# Altium PCB v4.3.PcbDoc
Units mm, origin at the board's own origin, x right, y up, seen from the top; angles counter-clockwise.
Board outline 100.32 x 66.7 mm, 2 copper layers (Top Layer, Bottom Layer); 32 components, 24 nets, 124 pads, 72 vias.
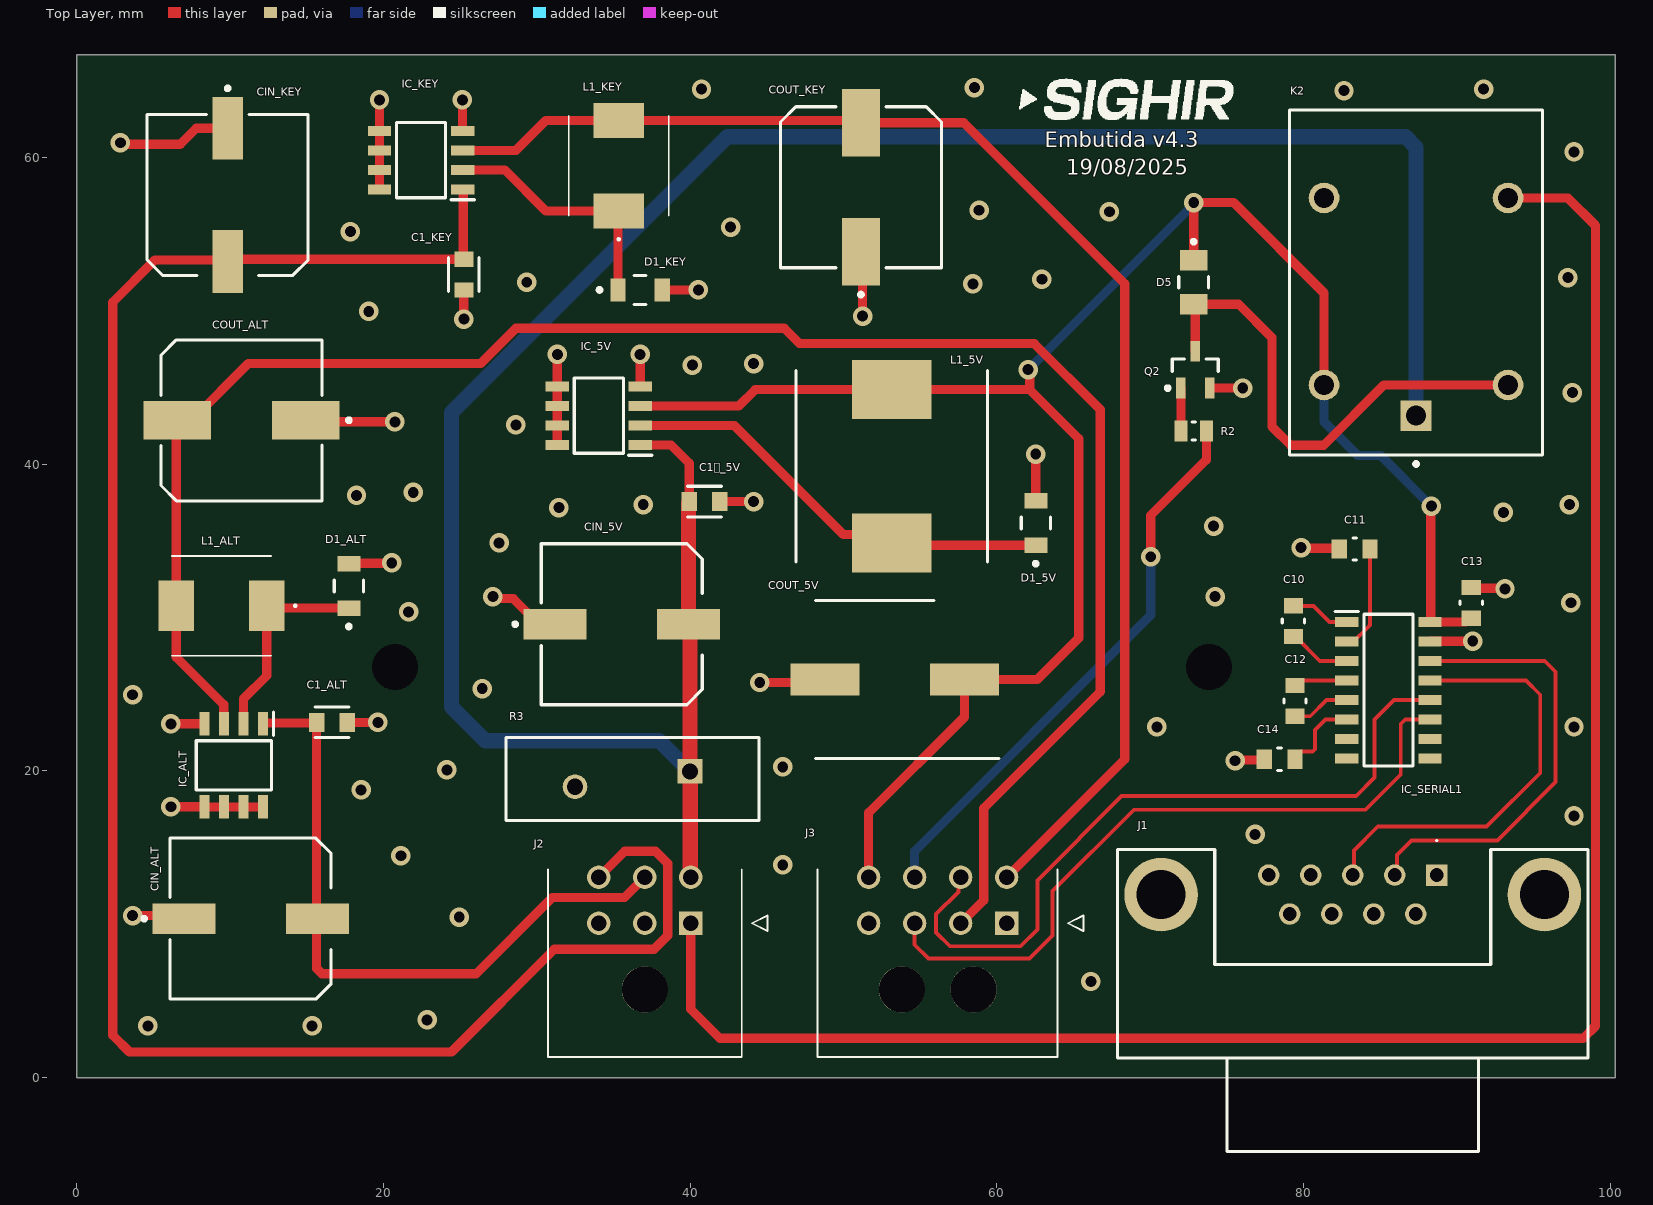
[diagram p0: Top Layer view]
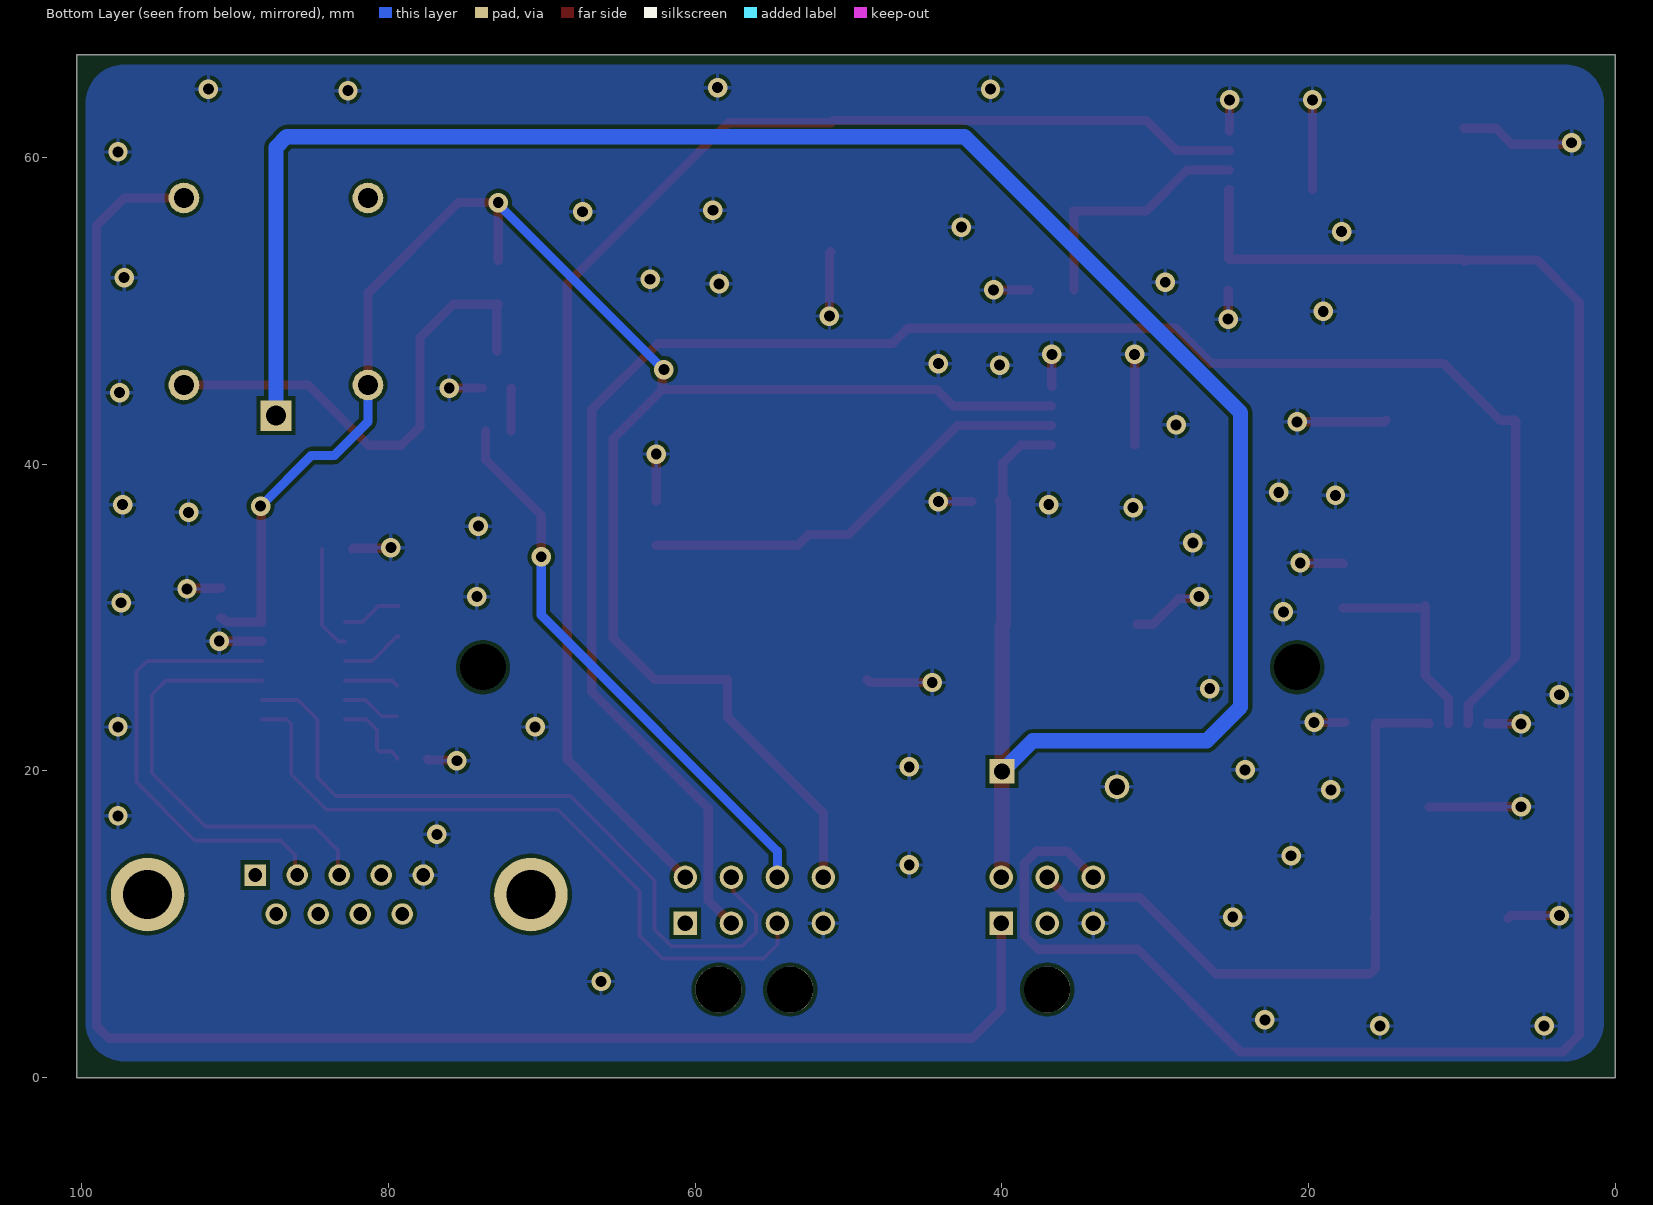
[diagram p1: Bottom Layer view, seen from below]
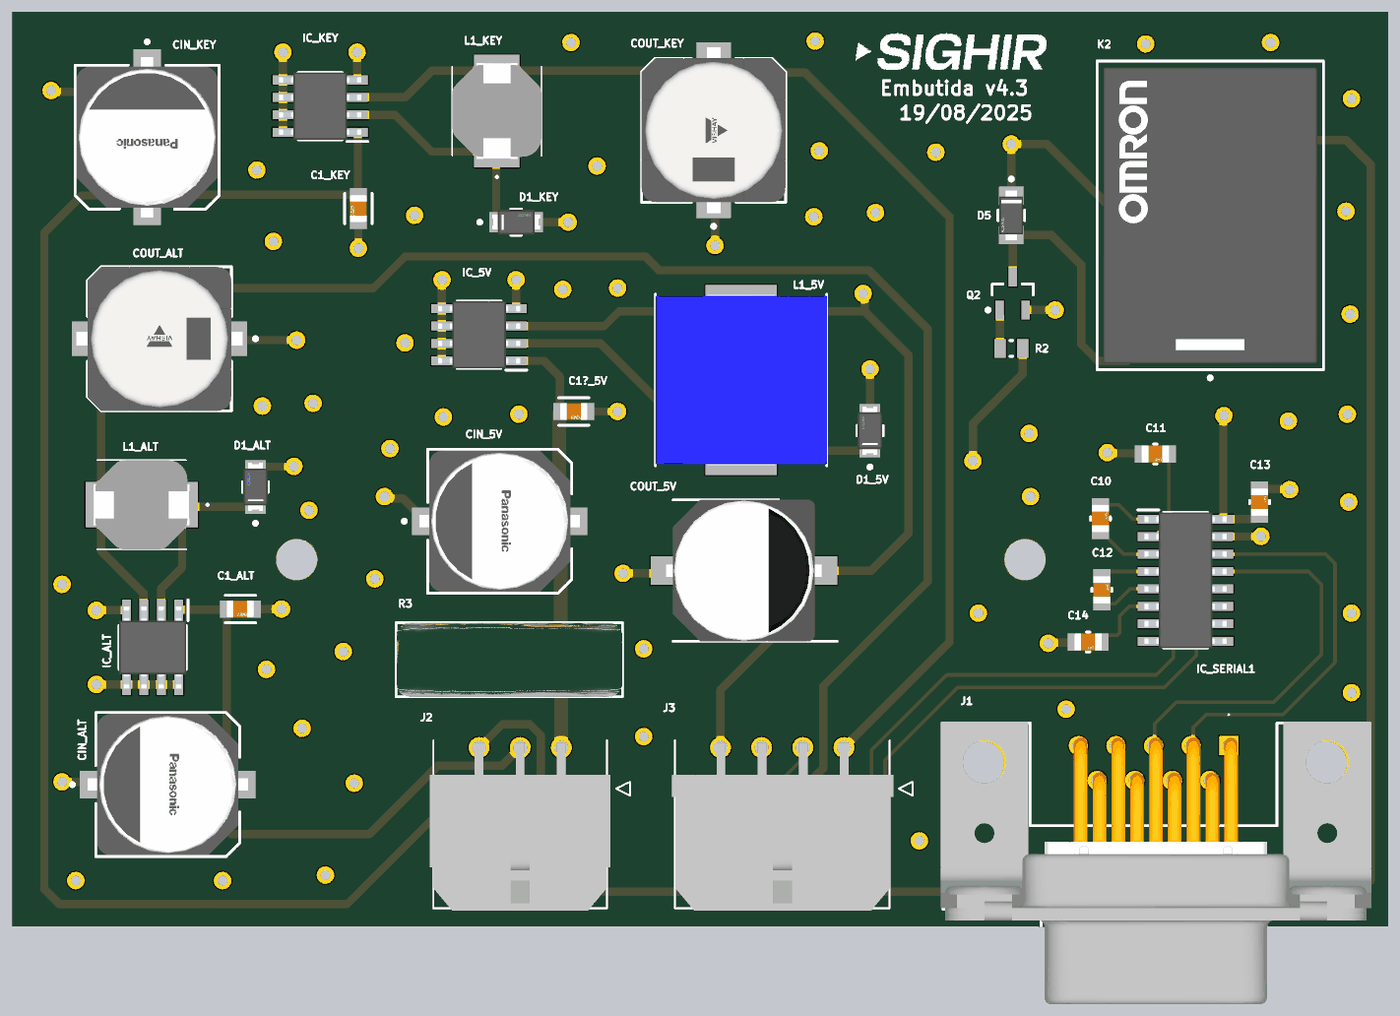
[diagram p2: 3D render of the assembled board from above, using the file's embedded part models]

## Layer stack, top to bottom
Top Solder: solder mask 0.0102, Solder Resist, Dk 3.5
Top Layer: signal copper 0.0356
Dielectric 1: dielectric 0.32, FR-4, Dk 4.8
Bottom Layer: signal copper 0.0356
Bottom Solder: solder mask 0.0102, Solder Resist, Dk 3.5

## Board outline
0,0 0,66.7 100.32,66.7 100.32,0

## Design rules (kind name [scope] priority, off if disabled: settings)
Clearance [All] p1: gap=0.254 ignorepadtopadclearanceinfootprint=FALSE
HoleSize [All] p1: absolutevalues=TRUE maxlimit=3.5 minlimit=0.025 maxpercent=80.000 minpercent=20.000
PolygonConnect [All] p1: connectstyle=Relief reliefconductorwidth=0.254 reliefentries=4 polygonreliefangle="90 Angle" airgapwidth=0.254
RoutingVias [All] p1: holewidth=0.711 width=1.27 viastyle="Through Hole" minholewidth=0.711 minwidth=1.27 maxholewidth=0.711 maxwidth=1.27
SolderMaskExpansion [All] p1: expansion=0.102 istentingtop=FALSE
SupplyNets "Schematic Supply Nets_8" [InNet('3V3_KEY')] p1: voltage=0.000
SupplyNets "Schematic Supply Nets_7" [InNet('ALT_IN')] p2: voltage=0.000
SupplyNets "Schematic Supply Nets_4" [InNet('KEY_IN')] p3: voltage=0.000
SupplyNets "Schematic Supply Nets_3" [InNet('3V3_ALT')] p4: voltage=0.000
SupplyNets "Schematic Supply Nets_2" [InNet('GND')] p5: voltage=0.000
SupplyNets "Schematic Supply Nets_1" [InNet('5V')] p6: voltage=0.000
SupplyNets "Schematic Supply Nets" [InNet('24V')] p7: voltage=0.000
Width [All] p1: maxlimit=1 minlimit=0.254 preferedwidth=0.254 minimp=50.000000 maximp=50.000000 favimp=50.000000
29 further rules are at their usual default settings.

## Classes and differential pairs
component class Power: "C1_5V" C1_ALT C1_KEY CIN_5V CIN_ALT CIN_KEY COUT_5V COUT_ALT COUT_KEY D1_5V D1_ALT D1_KEY IC_5V IC_ALT IC_KEY L1_5V L1_ALT L1_KEY
component class Comm: C10 C11 C12 C13 C14 D5 IC_SERIAL1 J1 J2 J3 K2 Q2 R2 R3

## Components (designator, comment, footprint, x,y, rotation, side; value= is the part's Value field where it differs from the comment)
"C1_5V" "08055C105KAT2A" FP-0805-L_2_01_0_2-W_1_25-MFG 40.937,37.568 r0 top
C1_ALT "08055C105KAT2A" FP-0805-L_2_01_0_2-W_1_25-MFG 16.637,23.168 r0 top
C1_KEY "08055C105KAT2A" FP-0805-L_2_01_0_2-W_1_25-MFG 25.237,52.368 r270 top
C10 "08055C104J4T2A" FP-0805-L_2_01_0_2-W_1_25-MFG 79.337,29.768 r90 top
C11 "08055C104J4T2A" FP-0805-L_2_01_0_2-W_1_25-MFG 83.337,34.468 r0 top
C12 "08055C104J4T2A" FP-0805-L_2_01_0_2-W_1_25-MFG 79.437,24.568 r90 top
C13 "08055C104J4T2A" FP-0805-L_2_01_0_2-W_1_25-MFG 90.937,30.968 r90 top
C14 "08055C104J4T2A" FP-0805-L_2_01_0_2-W_1_25-MFG 78.437,20.768 r0 top
CIN_5V "EEEFK1V471SP" FP-FKSG-MFG 35.537,29.568 r0 top
CIN_ALT "EEEFK1V471SP" FP-FKSG-MFG 11.337,10.368 r0 top
CIN_KEY "EEEFK1V471SP" FP-FKSG-MFG 9.837,57.568 r270 top
COUT_5V "B40900B7277M000" CAPAE1030X1050N 53.337,25.968 r180 top
COUT_ALT "MAL215099001E3" FP-MAL2150-1010-MFG 10.737,42.868 r180 top
COUT_KEY "MAL215099001E3" FP-MAL2150-1010-MFG 51.137,58.068 r90 top
D1_5V "1N5819HW1-7-F" FP-SOD123F_Type_B-MFG 62.537,36.168 r90 top value=30pF
D1_ALT "1N5819HW1-7-F" FP-SOD123F_Type_B-MFG 17.737,32.068 r90 top value=30pF
D1_KEY "1N5819HW1-7-F" FP-SOD123F_Type_B-MFG 36.737,51.368 r0 top value=30pF
D5 "S1GFL" FP-425AD-MFG 72.837,51.868 r270 top
IC_5V "XL1509-5.0E1" SOIC127P600X175-8N 34.037,43.168 r180 top
IC_ALT "XL1509-3V3E1" SOIC127P600X175-8N 10.237,20.368 r270 top
IC_KEY "XL1509-3V3E1" SOIC127P600X175-8N 22.449,59.833 r180 top
IC_SERIAL1 "MAX3232CSE+T" SOIC127P600X175-16N 85.537,25.268 r0 top
J1 "DB9" L77DFE09S1AMN 88.687,13.208 r0 top
J2 "43045-0600" 43045-06(00,01,02,10) 40.037,10.068 r0 top
J3 "43045-0800" 43045-08(00,01,02,10) 60.637,10.068 r0 top
K2 "G5LE-14-DC5" FP-G5LE-14-DC5-MFG 87.337,51.868 r90 top
L1_5V "SRR1260-680M" INDPM125125X650N 53.137,39.868 r90 top
L1_ALT "SPM6545VT-470M-D" SPM6545VT 9.437,30.768 r180 top
L1_KEY "SPM6545VT-470M-D" SPM6545VT 35.337,59.468 r90 top
Q2 "BC847B" INF-SOT23_M 72.937,46.168 r90 top
R2 "10k" RESC2013X50X30LL20T20 72.837,42.168 r0 top
R3 "MOV-14D471K" FP-MOV-14D471K-MFG 36.237,19.468 r180 top value=516pF

## Footprints (in the part's own frame and the unit in brackets; to place one, negate y for a bottom-side part, rotate by r counter-clockwise, add the part's x,y. Pads: shape width x height; smd on the part's side, far side on the other; paste and mask are expansions set on the pad)
43045-06(00,01,02,10) [mm]
  rect 1.52x1.52 hole 1.02: 1(0,0)
  round 1.52 hole 1.02: 2(-3,0) 3(-6,0) 4(0,3) 5(-3,3) 6(-6,3)
  round 3 hole 3 unplated: 7(-3,-4.32)
  silkscreen extent -9.33,-8.72 5,3.52, body extent -9.58,-8.89 3.57,3.34, height 8.69
43045-08(00,01,02,10) [mm]
  rect 1.52x1.52 hole 1.02: 1(0,0)
  round 1.52 hole 1.02: 2(-3,0) 3(-6,0) 4(-9,0) 5(0,3) 6(-3,3) 7(-6,3) 8(-9,3)
  round 3 hole 3 unplated: 9(-2.16,-4.32) 10(-6.84,-4.32)
  silkscreen extent -12.32,-8.72 5,3.52, body extent -12.54,-8.89 3.61,3.34, height 8.73
CAPAE1030X1050N [mm]
  rect 4.5x2.1 smd: 1(-4.55,0) 2(4.55,0)
  silkscreen extent -6.8,-5.15 5.15,5.15, body extent -5.67,-5.18 5.67,5.18, height 12.67
FP-425AD-MFG [mm]
  rect 1.34x1.8 smd paste+0 mask+0: 1(-1.43,0) 2(1.43,0)
  silkscreen extent -2.77,-0.97 0.39,0.97, body extent -2.2,-1.07 2.2,1.07, height 0.25
FP-0805-L_2_01_0_2-W_1_25-MFG [mm]
  rect 1x1.25 smd paste+0 mask+0: 1(-1,0) 2(1,0)
  silkscreen extent -1.1,-1 1.1,1, body extent -1.6,-0.82 1.6,0.82, height 0.25
FP-FKSG-MFG [mm]
  rect 4.1x2 smd paste+0 mask+0: 1(-4.35,0) 2(4.35,0)
  silkscreen extent -7.07,-5.25 5.25,5.25, body extent -6.65,-5.5 6.65,5.5, height 0.25
FP-G5LE-14-DC5-MFG [mm]
  rect 2x2 hole 1.3 paste-2539.97 mask+0: 1(-8.7,0)
  round 2 hole 1.3 paste-2539.97 mask+0: 2(-6.7,-6) 3(5.5,-6) 4(5.5,6) 5(-6.7,6)
  silkscreen extent -11.97,-8.25 11.25,8.25, body extent -11.35,-8.35 11.35,8.35, height 0.25
FP-MAL2150-1010-MFG [mm]
  rect 4.4x2.5 smd paste+0 mask+0: 1(-4.2,0) 2(4.2,0)
  silkscreen extent -7.13,-5.25 5.25,5.25, body extent -6.65,-5.5 6.65,5.5, height 0.25
FP-MOV-14D471K-MFG [mm]
  rect 1.6x1.6 hole 1.05 paste-2539.97 mask+0: 1(-3.75,-0.5)
  round 1.6 hole 1.05 paste-2539.97 mask+0: 2(3.75,0.5)
  silkscreen extent -8.25,-2.7 8.25,2.7, body extent -8.35,-2.8 8.35,2.8, height 0.25
FP-SOD123F_Type_B-MFG [mm]
  rect 1x1.5 smd paste+0 mask+0: 1(-1.45,0) 2(1.45,0)
  silkscreen extent -2.77,-0.95 0.38,0.95, body extent -2.05,-1.05 2.05,1.05, height 0.25
INDPM125125X650N [mm]
  rect 3.85x5.2 smd: 1(-5,0) 2(5,0)
  silkscreen extent -6.25,-6.25 6.25,6.25, body extent -6.25,-6.25 6.25,6.25, height 6.5
INF-SOT23_M [mm] "SOT23, 3-Leads, Body 2.9x1.3 mm, Pitch 0.95 mm, IPC Low Density"
  rect 1.35x0.6 smd: 1(-1.2,0.95) 2(-1.2,-0.95) 3(1.2,0)
  silkscreen extent -1.32,-1.5 0.7,1.92, body extent -0.7,-1.5 0.7,1.5, height 1.1
L77DFE09S1AMN [mm]
  rect 1.4x1.4 hole 0.9: 1(0,0)
  round 1.4 hole 0.9: 2(-2.74,0) 3(-5.48,0) 4(-8.22,0) 5(-10.96,0) 6(-1.37,-2.54) 7(-4.11,-2.54) 8(-6.85,-2.54) 9(-9.59,-2.54)
  round 4.8 hole 3.2: MH1(7.02,-1.27) MH2(-17.98,-1.27)
  silkscreen extent -20.83,-18.04 9.87,2.3, body extent -21.01,-18.85 10.39,1.75, height 13.89
RESC2013X50X30LL20T20 [mm] "Chip Resistor, 2-Leads, Body 2.00x1.25mm, IPC High Density"
  rect 0.85x1.35 smd: 1(-0.825,0) 2(0.825,0)
  silkscreen extent -0.1,-0.58 0.1,0.58, body extent -1.1,-0.72 1.1,0.72, height 0.5
SOIC127P600X175-8N [mm]
  rect 1.525x0.65 smd: 1(-2.712,1.905) 2(-2.712,0.635) 3(-2.712,-0.635) 4(-2.712,-1.905) 5(2.712,-1.905) 6(2.712,-0.635) 7(2.712,0.635) 8(2.712,1.905)
  silkscreen extent -3.47,-2.45 1.6,2.58, body extent -3,-2.45 3,2.45, height 1.75
SOIC127P600X175-16N [mm]
  rect 1.525x0.65 smd: 1(-2.712,4.445) 2(-2.712,3.175) 3(-2.712,1.905) 4(-2.712,0.635) 5(-2.712,-0.635) 6(-2.712,-1.905) 7(-2.712,-3.175) 8(-2.712,-4.445) 9(2.712,-4.445) 10(2.712,-3.175) 11(2.712,-1.905) 12(2.712,-0.635) 13(2.712,0.635) 14(2.712,1.905) 15(2.712,3.175) 16(2.712,4.445)
  silkscreen extent -3.47,-4.95 1.6,5.12, body extent -3,-4.95 3,4.95, height 1.75
SPM6545VT [mm]
  rect 2.3x3.3 smd: 1(-2.95,0) 2(2.95,0)
  silkscreen extent -4.85,-3.25 3.25,3.25, body extent -3.48,-3.25 3.52,3.25, height 4.35

## Part data
"C1_5V" C1_ALT C1_KEY: library part CMP-2007-04696-2, "General Purpose Ceramic Capacitor, 0805, 1uF, 10%, X7R, 15%, 50V", Capacitance=1uF, Case Code (Imperial)=0805, Case Code (Metric)=2012, Dielectric=X7R, Max Operating Temperature=125°C, Min Operating Temperature=-55°C, Package Quantity=1, Tolerance=10%, Voltage=50V, Case/Package=0805, Contact Plating=Tin, Depth=1.25mm, Dissipation Factor=2.5%, Lead Free="Lead Free", Length=2.01mm, Mount="Surface Mount", Packaging="Tape and Reel", Radiation Hardening=No, REACH SVHC="No SVHC", RoHS Compliant=Yes, Series=-, Termination=SMD/SMT, Thickness=0.037inch, Voltage Rating=50V, Voltage Rating (DC)=50V, Width=0.049inch
C10 C11 C12 C13 C14: library part CMP-2007-04725-2, "Automotive Ceramic Capacitor, 0805, 100nF, 5%, X7R, 15%, 50V", Capacitance=100nF, Case Code (Imperial)=0805, Case Code (Metric)=2012, Dielectric=X7R, Max Operating Temperature=125°C, Min Operating Temperature=-55°C, Package Quantity=4000, Ratings=AEC-Q200, Tolerance=5%, Voltage Rating=50V, Case/Package=0805, Construction=Flat, Contact Plating=Tin, Depth=1.25mm, Dissipation Factor=2.5%, Height=0.94mm, Lead Free="Lead Free", Length=2.01mm, Mount="Surface Mount", Number of Pins=2, Packaging="Tape and Reel", Radiation Hardening=No, RoHS Compliant=Yes, Series=-, Termination=SMD/SMT, Thickness=0.037inch, Voltage Rating (DC)=50V, Width=0.049inch
CIN_5V CIN_ALT CIN_KEY: library part CMP-05427-000037-1, "CAP ALUM 470UF 20% 35V SMD", Capacitance=470uF, Case/Package=Radial, ESR (Equivalent Series Resistance)=80mR, Max Operating Temperature=105°C, Min Operating Temperature=-55°C, Package Quantity=500, Ripple Current=552.5mA, Ripple Current (AC)=850mA, Tolerance=20%, Voltage Rating=35V, Diameter=10mm, Height=10.2mm, Height - Seated (Max)=0.413inch, Life (Hours)=2000Hour, Mount="Surface Mount", Packaging="Cut Tape", Polarity=Polar, RoHS Compliant=Yes, Voltage Rating (DC)=35V
COUT_5V: "Capacitor Polarised", Manufacturer_Name=TDK, Mouser Part Number=871-B40900B7277M000, Datasheet Link=https://product.tdk.com/system/files/dam/doc/product/capacitor/aluminum-electrolytic/hybrid-polymer/data_sheet/20/30/db/aec/b40900.pdf, Height=10.5mm, Manufacturer_Part_Number=B40900B7277M000, Mouser Price/Stock=https://www.mouser.co.uk/ProductDetail/EPCOS-TDK/B40900B7277M000?qs=P1JMDcb91o5CBLRrUxE0Gw%3D%3D
COUT_ALT COUT_KEY: library part CMP-00030-44434444-1, "MAL215099001E3 Aluminum Electrolytic Capacitor, 220 uF, 35 V, ± 20%, 2000 hours @ 105°C, Radial Can - SMD", Capacitance=220µF, Case/Package=Radial, Max Operating Temperature=105°C, Min Operating Temperature=-55°C, Ripple Current=630mA, Tolerance=20%, Voltage Rating=35V, Diameter=10mm, Height=10mm, Height - Seated (Max)=10.4902mm, Impedance=150mΩ, Life (Hours)=2500hours, Mount="Surface Mount", NexarPartId=44434444, Packaging=Digi-Reel®, Polarity=Polar, Radiation Hardening=No, REACH SVHC=Unknown, Ripple Current (AC)=630mA, RoHS=Compliant, Schedule B="8532220020, 8532220020", Voltage Rating (DC)=35V
D1_5V D1_ALT D1_KEY: library part CMP-12791-000028-1, "DIODE SBR 40V 1A SOD123F", Capacitance=30pF, Forward Current=1A, Manufacturer="Diodes Inc.", Max Junction Temp=+125°C, Max Repetitive Reverse Voltage=40V, Max Surge Forward Current=30A, Package="SOD123F (Type B)", Peak Reverse Current=0.5mA, Temperature="-55°C to +125°C", Temperature Range Low=-55°C, Automotive=No, Category=Diode, ComponentLink2Description=Datasheet, ComponentLink2URL=https://www.diodes.com/assets/Datasheets/1N5819HW1.pdf, Device Class L1="Discrete Semiconductors", Device Class L2=Diodes, Device Class L3="Rectifier Diodes", Digikey Description="DIODE SBR 40V 1A SOD123F", Footprint Url=https://www.diodes.com/assets/Package-Files/SOD123F%20(Type%20B).pdf, Height=1.15mm, Ipc Land Pattern Name=SOD350180X98-2, Lead Free=Yes, Manufacturer Part Number=1N5819HW1-7-F, Mouser Description="Schottky Diodes & Rectifiers 1A SBR 40Vrrm 0.51Vf 0.5mA 28Vrms", Octopart=https://octopart.com/1n5819hw1-7-f-diodes+inc.-67250096, Reverse Voltage=40V, RoHS=TRUE, Temperature Range High=+125°C
D5: library part CMP-00278-84331274-1, "S1GFL Rectifier Diode, 1 Phase, 1 Element, 1A, 400V V(RRM), Silicon", Average Rectified Current=1A, Capacitance=4pF, Manufacturer Lifecycle Status="ACTIVE, NOT REC", Max Forward Surge Current (Ifsm)=30A, Max Junction Temperature (Tj)=175°C, Max Operating Temperature=150°C, Max Repetitive Reverse Voltage (Vrrm)=400V, Min Operating Temperature=-55°C, Peak Reverse Current=1µA, Element Configuration=Single, Forward Current=1A, Height=1.08mm, Lifecycle Status=NRND, Max Reverse Voltage (DC)=400V, Mount="Surface Mount", NexarPartId=84331274, Reverse Recovery Time=2µs, Reverse Voltage=400V, RoHS=Compliant, Schedule B="8541100080, 8541100080", Weight=27.6mg
IC_5V: "Integrated Circuit", Manufacturer_Name=XLSEMI, Datasheet Link=https://datasheet.lcsc.com/szlcsc/XLSEMI-XL1509-5-0E1_C61063.pdf, Height=1.75mm, Manufacturer_Part_Number=XL1509-5.0E1
IC_ALT IC_KEY: library part XL1509-5.0E1, "Integrated Circuit", Manufacturer_Name=XLSEMI, Datasheet Link=https://datasheet.lcsc.com/szlcsc/XLSEMI-XL1509-5-0E1_C61063.pdf, Height=1.75mm, Manufacturer_Part_Number=XL1509-5.0E1
IC_SERIAL1: "Integrated Circuit", Manufacturer_Name="Analog Devices", Mouser Part Number=700-MAX3232CSET, Arrow Part Number=MAX3232CSE+T, Arrow Price/Stock=https://www.arrow.com/en/products/max3232cset/analog-devices?utm_currency=USD&region=nac, Datasheet Link=https://datasheets.maximintegrated.com/en/ds/MAX3222-MAX3241.pdf, Height=1.75mm, Manufacturer_Part_Number=MAX3232CSE+T, Mouser Price/Stock=https://www.mouser.co.uk/ProductDetail/Analog-Devices-Maxim-Integrated/MAX3232CSE%2bT?qs=CDqwynd4ZNoTB%252BLjbeQ4Qg%3D%3D
J1: library part L77DFE09S1AMN, "Connector", Manufacturer_Name="Amphenol Communications Solutions", Mouser Part Number=523-L77DFE09S1AMN, Datasheet Link=https://cdn.amphenol-icc.com/media/wysiwyg/files/drawing/l77dfxxxs1amn.pdf, Height=12.7mm, Manufacturer_Part_Number=L77DFE09S1AMN, Mouser Price/Stock=https://www.mouser.co.uk/ProductDetail/Amphenol-Commercial-Products/L77DFE09S1AMN?qs=mq7kV%2Fq8lk7eGEI8ax9brw%3D%3D
J2: "Connector", Manufacturer_Name=Molex, Mouser Part Number=538-43045-0600, Arrow Part Number=43045-0600, Arrow Price/Stock=https://www.arrow.com/en/products/43045-0600/molex?region=nac, Datasheet Link=https://www.molex.com/pdm_docs/sd/430450200_sd.pdf, Height=9.9mm, Manufacturer_Part_Number=43045-0600, Mouser Price/Stock=https://www.mouser.co.uk/ProductDetail/Molex/43045-0600?qs=mrPiglD9aYJ8CzJ%2FE2PNbw%3D%3D
J3: "Connector", Manufacturer_Name=Molex, Mouser Part Number=538-43045-0800, Datasheet Link=https://www.molex.com/pdm_docs/sd/430450200_sd.pdf, Height=8.77mm, Manufacturer_Part_Number=43045-0800, Mouser Price/Stock=https://www.mouser.co.uk/ProductDetail/Molex/43045-0800?qs=MGlPTwjtJ4Z70Z3DbkGxKw%3D%3D
K2: library part CMP-08822-000008-1, "RELAY GEN PURPOSE SPDT 10A 5V", Ambient Temperature Range High=+85°C, Ambient Temperature Range Low=-25°C, Coil Current=79.4mA, Coil Power=400mW, Coil Resistance=63Ω, Coil Voltage=5V, Current Rating=10A, Manufacturer=Omron, Package=0, Temperature="-25°C to +85°C", Automotive=No, Category=Relay, Coil Type=Non-Latching, ComponentLink2Description=Datasheet, ComponentLink2URL=https://omronfs.omron.com/en_US/ecb/products/pdf/en-g5le.pdf, Device Class L1=Electromechanical, Device Class L2=Relays, Device Class L3="Power Relays", Digikey Description="RELAY GEN PURPOSE SPDT 10A 5V", Height=19mm, Lead Free=Yes, Manufacturer Part Number=G5LE-14-DC5, Mouser Description="General Purpose Relays Power PCB Relay SPDT Sealed 5VDC", Number Of Contacts=1, Octopart=https://octopart.com/g5le-14-dc5-omron-28829, RoHS=TRUE, Standoff Height=0.5mm, Switching Current=10A, Temperature Range High=+85°C, Temperature Range Low=-25°C, Throw Configuration=SPDT
L1_5V: "Inductor", Manufacturer_Name=Bourns, Mouser Part Number=652-SRR1260-680M, Arrow Part Number=SRR1260-680M, Arrow Price/Stock=https://www.arrow.com/en/products/srr1260-680m/bourns?utm_currency=USD&region=nac, Datasheet Link=https://componentsearchengine.com/Datasheets/2/SRR1260-680M.pdf, Height=6.5mm, Manufacturer_Part_Number=SRR1260-680M, Mouser Price/Stock=https://www.mouser.co.uk/ProductDetail/Bourns/SRR1260-680M?qs=meVWcSOgEr6IqR5KoVnPsw%3D%3D
L1_ALT L1_KEY: "Inductor (FeSi Core)", Manufacturer_Name=TDK, Mouser Part Number=810-SPM6545VT-470M-D, Arrow Part Number=SPM6545VT-470M-D, Arrow Price/Stock=https://www.arrow.com/en/products/spm6545vt-470m-d/tdk?region=nac, Datasheet Link=https://product.tdk.com/system/files/dam/doc/product/inductor/inductor/smd/catalog/inductor_automotive_power_spm6545vt-d_en.pdf, Manufacturer_Part_Number=SPM6545VT-470M-D, Mouser Price/Stock=https://www.mouser.co.uk/ProductDetail/TDK/SPM6545VT-470M-D?qs=vmHwEFxEFR%2FaEnepn6nn%2Fw%3D%3D
Q2: library part CMP-1177-00042-1, "NPN Silicon AF Transistor, 45 V VCEO, 100 mA IC, SOT23, Reel, Green", Manufacturer=Infineon, ComponentLink1Description="Manufacturer URL", ComponentLink1URL=http://www.infineon.com/, ComponentLink2Description=Datasheet, ComponentLink2URL=http://www.infineon.com/dgdl/bc847series_bc848series_bc849series_bc850series.pdf?folderId=db3a304314dca389011541d30fa21656&fileId=db3a304314dca389011541d4630a1657, ComponentLink3Description="Package Specification", ComponentLink3URL=http://www.infineon.com/dgdl/SOT23-Package_Overview.pdf?folderId=db3a30431936bc4b0119532290053c66&fileId=db3a30431936bc4b0119533468123c85, fT (typ)="250Â MHz", Green=TRUE, IBM (max)="200Â mA", IC (max)="100Â mA", ICBO (max)="15Â nA", ICM (max)="200Â mA", Mounting Technology="Surface Mount", PackageDescription="3-Pin Small Outline Transistor Package, 1.3 x 2.9 mm Body, 0.95 mm Pitch", PackageReference=SOT23, PackageVersion=Apr-08, Packing=Reel, PartNumber=BC847B, Polarity=NPN, Ptot (max)="330Â mW", VCBO (max)="50Â V", VCEO (max)="45Â V", VEBO (max)="6Â V"
R2: library part CMP-2001-04896-1, Manufacturer="Vishay Dale", Part Number=CRCW08050000Z0EA
R3: library part CMP-07402-000007-1, "VARISTOR 470V 4.5KA DISC 14MM", Capacitance=516pF, Clamping Current=50A, Clamping Voltage=775V, Manufacturer="Bourns Inc.", Package=Radial, Temperature="-40°C to +105°C", Temperature Range High=+105°C, Temperature Range Low=-40°C, Varistor Voltage=423V, Voltage Rating Ac=300V, Voltage Rating Dc=385V, Voltage Tolerance=10%, Automotive=No, Category=Res, ComponentLink2Description=Datasheet, ComponentLink2URL=https://www.bourns.com/docs/product-datasheets/mov14d.pdf?sfvrsn=d6ed188_26, Device Class L1="Circuit Protection", Device Class L2=Varistors, Device Class L3=unset, Digikey Description="VARISTOR 470V 4.5KA DISC 14MM", Esd Protec Present=true, Height=20mm, Lead Free=Yes, Manufacturer Part Number=MOV-14D471K, Mouser Description="Varistors 470volts 14mm", Octopart=https://octopart.com/mov-14d471k-bourns-21388916, RoHS=TRUE

## Free pads (board coordinates)
  round 0 hole 3: 6(20.737,26.768) 7(73.837,26.768)

## Via types
v1: diameter 1.27, hole 0.711, Top Layer to Bottom Layer, 72 vias

## Nets (pads, with @x,y where several pads share a name; then routed paths per layer and width w, separated by ;. In a path a pad name is that pad's centre, name@x,y a point inside that pad or via, vN(x,y) a via of type N, cw(c..) or ccw(c..) an arc to the next point about the centre after c; other vN are vias at no path point)
3V3_ALT: COUT_ALT.2 IC_ALT.3 J3.2 L1_ALT.2 | length 123.2
  Top Layer w0.6: IC_ALT.3 9.577,23.105 9.577,24.328 6.487,27.418 L1_ALT.2 6.487,42.818 COUT_ALT.2 7.487,42.868 11.187,46.568 26.337,46.568 28.637,48.868 46.137,48.868 47.137,47.868 62.437,47.868 66.737,43.568 66.737,25.168 59.137,17.568 59.137,11.568 J3.2
3V3_KEY: COUT_KEY.2 IC_KEY.3 J3.5 L1_KEY.2 | length 90.3
  Top Layer w0.6: IC_KEY.3 28.637,60.468 30.587,62.418 L1_KEY.2 50.987,62.418 COUT_KEY.2 57.837,62.268 68.337,51.768 68.337,20.768 J3.5
5V: C13.1 COUT_5V.1 D5.1 IC_5V.3 IC_SERIAL1.16 J3.8 K2.5 L1_5V.2 | length 126.9
  Top Layer w0.6: IC_5V.3 43.172,43.803 44.237,44.868 L1_5V.2 62.137,44.868 ; J3.8 51.637,17.268 57.887,23.518 COUT_5V.1 62.637,25.968 65.337,28.668 65.337,41.668 62.137,44.868 ; v1(62.037,46.168) 62.137,46.068 62.137,44.868 ; D5.1 v1(72.837,57.068) 75.437,57.068 81.337,51.168 K2.5 ; v1(88.337,37.268) 88.293,37.224 88.293,29.738 88.268,29.713 IC_SERIAL1.16 90.557,29.713 90.812,29.968 C13.1
  Bottom Layer w0.6: v1(62.037,46.168) 72.837,56.968 v1(72.837,57.068) ; K2.5 81.337,42.768 83.537,40.568 85.037,40.568 v1(88.337,37.268)
24V: "C1_5V.1" CIN_5V.2 IC_5V.1 J2.4 K2.1 R3.1 | length 155.4
  Top Layer w0.6: IC_5V.1 38.742,41.263 39.937,40.068 39.937,37.568
  Top Layer w1: 39.937,37.568 39.887,37.518 CIN_5V.2 39.987,29.468 R3.1 40.012,19.943 40.012,13.093 J2.4
  Bottom Layer w1: R3.1 37.987,21.968 26.637,21.968 24.437,24.168 24.437,43.368 42.437,61.368 86.637,61.368 87.337,60.668 K2.1
ALT_IN: C1_ALT.1 CIN_ALT.2 IC_ALT.1 J2.5 | length 43.7
  Top Layer w0.6: IC_ALT.1 12.142,23.099 12.167,23.124 15.593,23.124 15.637,23.08 15.637,10.418 CIN_ALT.2 15.637,10.318 15.637,7.118 15.987,6.768 26.037,6.768 31.023,11.754 35.723,11.754 J2.5
C1: C10.1 IC_SERIAL1.3 | length 4.1
  Top Layer w0.254: C10.1 79.462,28.768 81.057,27.173 IC_SERIAL1.3
GND: "C1_5V.2" C1_ALT.2 C1_KEY.2 C11.1 C13.2 C14.1 CIN_5V.1 CIN_ALT.1 CIN_KEY.1 COUT_5V.2 COUT_ALT.1 COUT_KEY.1 D1_5V.2 D1_ALT.2 D1_KEY.2 IC_5V.4 IC_5V.5 IC_5V.6 IC_5V.7 IC_5V.8 IC_ALT.4 IC_ALT.5 IC_ALT.6 IC_ALT.7 IC_ALT.8 IC_KEY.4 IC_KEY.5 IC_KEY.6 IC_KEY.7 IC_KEY.8 IC_SERIAL1.15 J1.5 J2.3 J3.4 Q2.2 R3.2 | length 80.2
  Top Layer w0.6: v1@2.862,60.943 v1(2.837,60.968) 2.937,60.868 6.737,60.868 7.787,61.918 CIN_KEY.1 ; v1(3.637,10.568) 6.787,10.568 CIN_ALT.1 ; v1(6.137,17.668) 6.143,17.662 8.326,17.662 IC_ALT.5 IC_ALT.6 IC_ALT.7 IC_ALT.8 ; v1(6.137,23.068) 6.143,23.074 8.326,23.074 IC_ALT.4 ; COUT_ALT.1 15.037,42.768 v1(20.737,42.768) ; C1_ALT.2 v1(19.637,23.168) ; D1_ALT.2 17.762,33.543 20.512,33.543 v1(20.537,33.568) ; IC_KEY.8 IC_KEY.7 IC_KEY.6 IC_KEY.5 v1(19.737,63.768) ; v1(25.137,63.768) 25.149,63.756 25.149,61.75 IC_KEY.4 ; v1(25.237,49.468) C1_KEY.2 ; v1(27.137,31.368) 27.265,31.24 28.465,31.24 30.137,29.568 CIN_5V.1 ; IC_5V.8 IC_5V.7 IC_5V.6 IC_5V.5 31.331,45.079 31.331,47.162 v1(31.337,47.168) ; v1(36.737,47.168) 36.743,47.162 36.743,45.079 IC_5V.4 ; D1_KEY.2 v1(40.537,51.368) ; 41.937,37.568 v1(44.137,37.568) ; v1(44.537,25.768) 48.587,25.768 COUT_5V.2 ; COUT_KEY.1 51.237,53.768 v1(51.237,49.668) ; D1_5V.2 v1(62.537,40.668) ; Q2.2 v1(76.037,44.968) ; v1(75.537,20.668) 75.587,20.718 77.387,20.718 C14.1 ; v1(79.837,34.568) 79.887,34.518 82.287,34.518 C11.1 ; IC_SERIAL1.15 88.261,28.455 91.024,28.455 v1(91.037,28.468) ; C13.2 90.987,31.918 93.087,31.918 v1(93.137,31.868)
  other v1: 4.637,3.368 15.337,3.368 22.837,3.768 66.137,6.268 24.937,10.468 46.037,13.868 21.137,14.468 76.837,15.868 97.637,17.068 18.537,18.768 24.137,20.068 46.037,20.268 70.437,22.868 97.637,22.868 3.637,24.968 26.437,25.368 21.637,30.368 97.437,30.968 74.237,31.368 27.537,34.868 74.137,35.968 93.037,36.868 31.437,37.168 36.937,37.368 97.337,37.368 18.237,37.968 21.937,38.168 28.637,42.568 97.537,44.668 40.137,46.468 44.137,46.568 19.037,49.968 58.437,51.768 29.337,51.868 62.937,52.068 97.237,52.168 17.837,55.168 42.637,55.468 67.337,56.468 58.837,56.568 97.637,60.368 82.637,64.368 40.737,64.468 91.737,64.468 58.537,64.568
GPIO: J3.7 R2.2 | length 37
  Top Layer w0.6: v1(70.037,33.968) 70.037,36.668 73.662,40.293 R2.2
  Bottom Layer w0.6: J3.7 54.637,14.768 70.037,30.168 v1(70.037,33.968)
KEY_IN: C1_KEY.1 CIN_KEY.2 IC_KEY.1 J2.6 | length 126.5
  Top Layer w0.6: IC_KEY.1 25.174,57.928 25.199,57.903 25.199,53.406 25.161,53.368 9.987,53.368 CIN_KEY.2 9.737,53.318 5.087,53.318 2.337,50.568 2.337,2.768 3.437,1.668 24.437,1.668 31.137,8.368 37.637,8.368 38.537,9.268 38.537,13.968 37.737,14.768 35.737,14.768 J2.6
NetC10_2: C10.2 IC_SERIAL1.1 | length 3.9
  Top Layer w0.254: C10.2 80.637,30.768 81.692,29.713 IC_SERIAL1.1
NetC11_2: C11.2 IC_SERIAL1.2 | length 6.9
  Top Layer w0.254: IC_SERIAL1.2 83.262,28.443 84.187,29.368 ; 84.188,29.368 84.337,29.517 C11.2
NetC12_1: C12.1 IC_SERIAL1.5 | length 3.8
  Top Layer w0.254: C12.1 80.437,23.568 81.502,24.633 IC_SERIAL1.5
NetC12_2: C12.2 IC_SERIAL1.4 | length 3.5
  Top Layer w0.254: C12.2 79.772,25.903 IC_SERIAL1.4
NetC14_2: C14.2 IC_SERIAL1.6 | length 5.3
  Top Layer w0.254: C14.2 79.437,20.893 79.81,21.266 80.588,21.266 80.737,21.415 80.737,22.668 81.432,23.363 IC_SERIAL1.6
NetD5_2: D5.2 K2.2 Q2.3 | length 32.4
  Top Layer w0.6: Q2.3 72.937,50.338 D5.2 75.767,50.438 77.937,48.268 77.937,42.468 79.167,41.238 81.307,41.238 85.237,45.168 K2.2
NetQ2_1: Q2.1 R2.1 | length 2.8
  Top Layer w0.6: Q2.1 71.987,44.593 72.012,44.568 R2.1
PSM: J2.1 K2.3 | length 124.4
  Top Layer w0.6: J2.1 40.037,4.468 41.937,2.568 98.237,2.568 99.037,3.368 99.037,55.568 97.237,57.368 K2.3
RX_EXT: IC_SERIAL1.13 J1.3 | length 28.6
  Top Layer w0.254: J1.3 83.277,13.278 83.277,14.808 84.837,16.368 91.937,16.368 95.437,19.868 95.437,24.968 94.502,25.903 IC_SERIAL1.13
RX_MIC: IC_SERIAL1.12 J3.6 | length 47.6
  Top Layer w0.254: J3.6 57.484,12.915 57.484,12.115 56.037,10.668 56.037,9.468 56.937,8.568 61.537,8.568 62.637,9.668 62.637,12.868 68.137,18.368 83.437,18.368 84.637,19.568 84.637,23.368 85.902,24.633 IC_SERIAL1.12
SW_3V3: D1_KEY.1 IC_KEY.2 L1_KEY.1 | length 16.5
  Top Layer w0.6: IC_KEY.2 27.907,59.198 30.587,56.518 L1_KEY.1 35.287,56.468 D1_KEY.1
SW_3V3_ALT: D1_ALT.1 IC_ALT.2 L1_ALT.1 | length 13.7
  Top Layer w0.6: IC_ALT.2 10.872,24.703 12.387,26.218 L1_ALT.1 12.537,30.618 D1_ALT.1
SW_5V: D1_5V.1 IC_5V.2 L1_5V.1 | length 29
  Top Layer w0.6: IC_5V.2 42.872,42.533 49.988,35.417 52.588,35.417 53.287,34.718 D1_5V.1
TX_EXT: IC_SERIAL1.14 J1.2 | length 29.4
  Top Layer w0.254: J1.2 86.1,13.361 86.1,14.531 87.037,15.468 92.637,15.468 96.437,19.268 96.437,26.468 95.732,27.173 IC_SERIAL1.14
TX_MIC: IC_SERIAL1.11 J3.3 | length 45.5
  Top Layer w0.254: J3.3 54.637,8.668 55.537,7.768 62.137,7.768 63.637,9.268 63.637,12.168 68.937,17.468 84.037,17.468 86.337,19.768 86.337,23.068 86.632,23.363 IC_SERIAL1.11
pads on no net: IC_SERIAL1.7 IC_SERIAL1.8 IC_SERIAL1.9 IC_SERIAL1.10 J1.1 J1.4 J1.6 J1.7 J1.8 J1.9 J1.MH1 J1.MH2 J2.2 J2.7 J3.1 J3.9 J3.10 K2.4

## Polygon pours and split planes (outlines as drawn)
GND on Bottom Layer "GND_L02_P000" (solid, pour order 0): 0.737,63.528 cw(c3.277,63.528) 3.277,66.068 97.197,66.068 cw(c97.197,63.528) 99.737,63.528 99.737,3.608 cw(c97.197,3.608) 97.197,1.068 3.277,1.068 cw(c3.277,3.608) 0.737,3.608

## Silkscreen, mask and mechanical layers (free items; w line width, h text height)
Top Overlay:
  drawing of 7 lines, arcs and shapes, not listed
  text "Embutida v4.3" at 63.137,60.668 h1
  text "19/08/2025" at 64.537,58.868 h1